# EAGLE board power supply diagram (EAGLE 9.6.2)
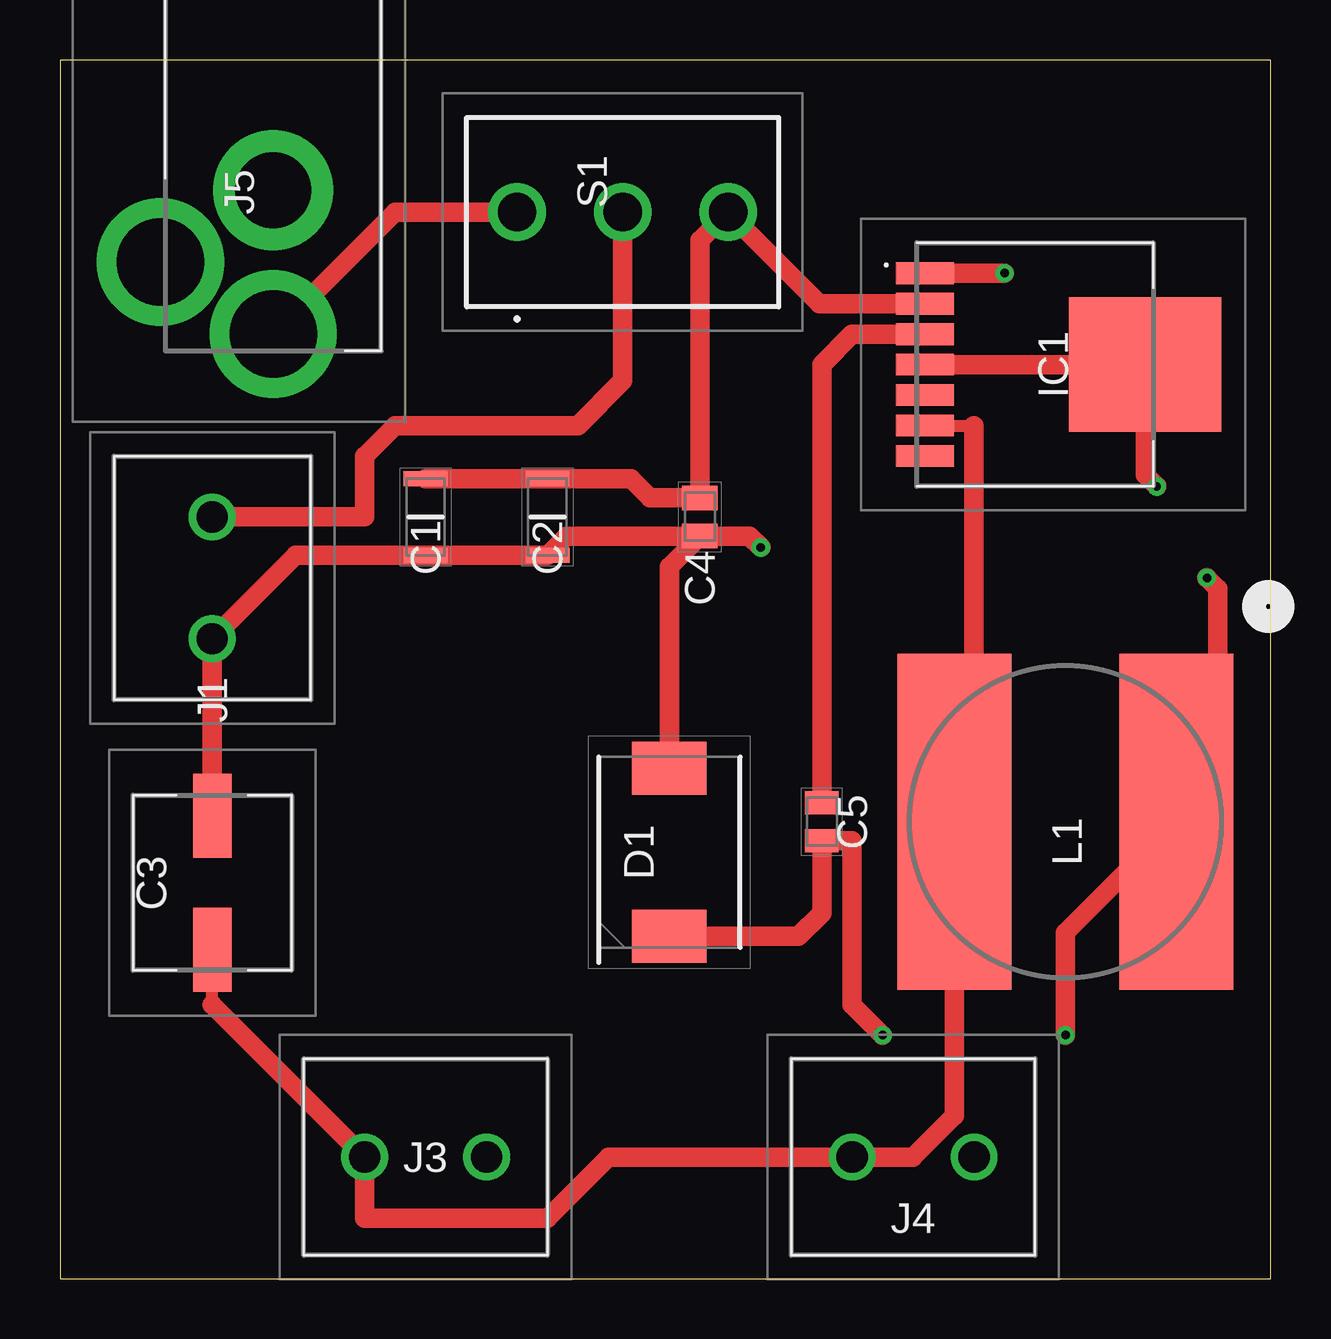
[diagram p0: board, top side]
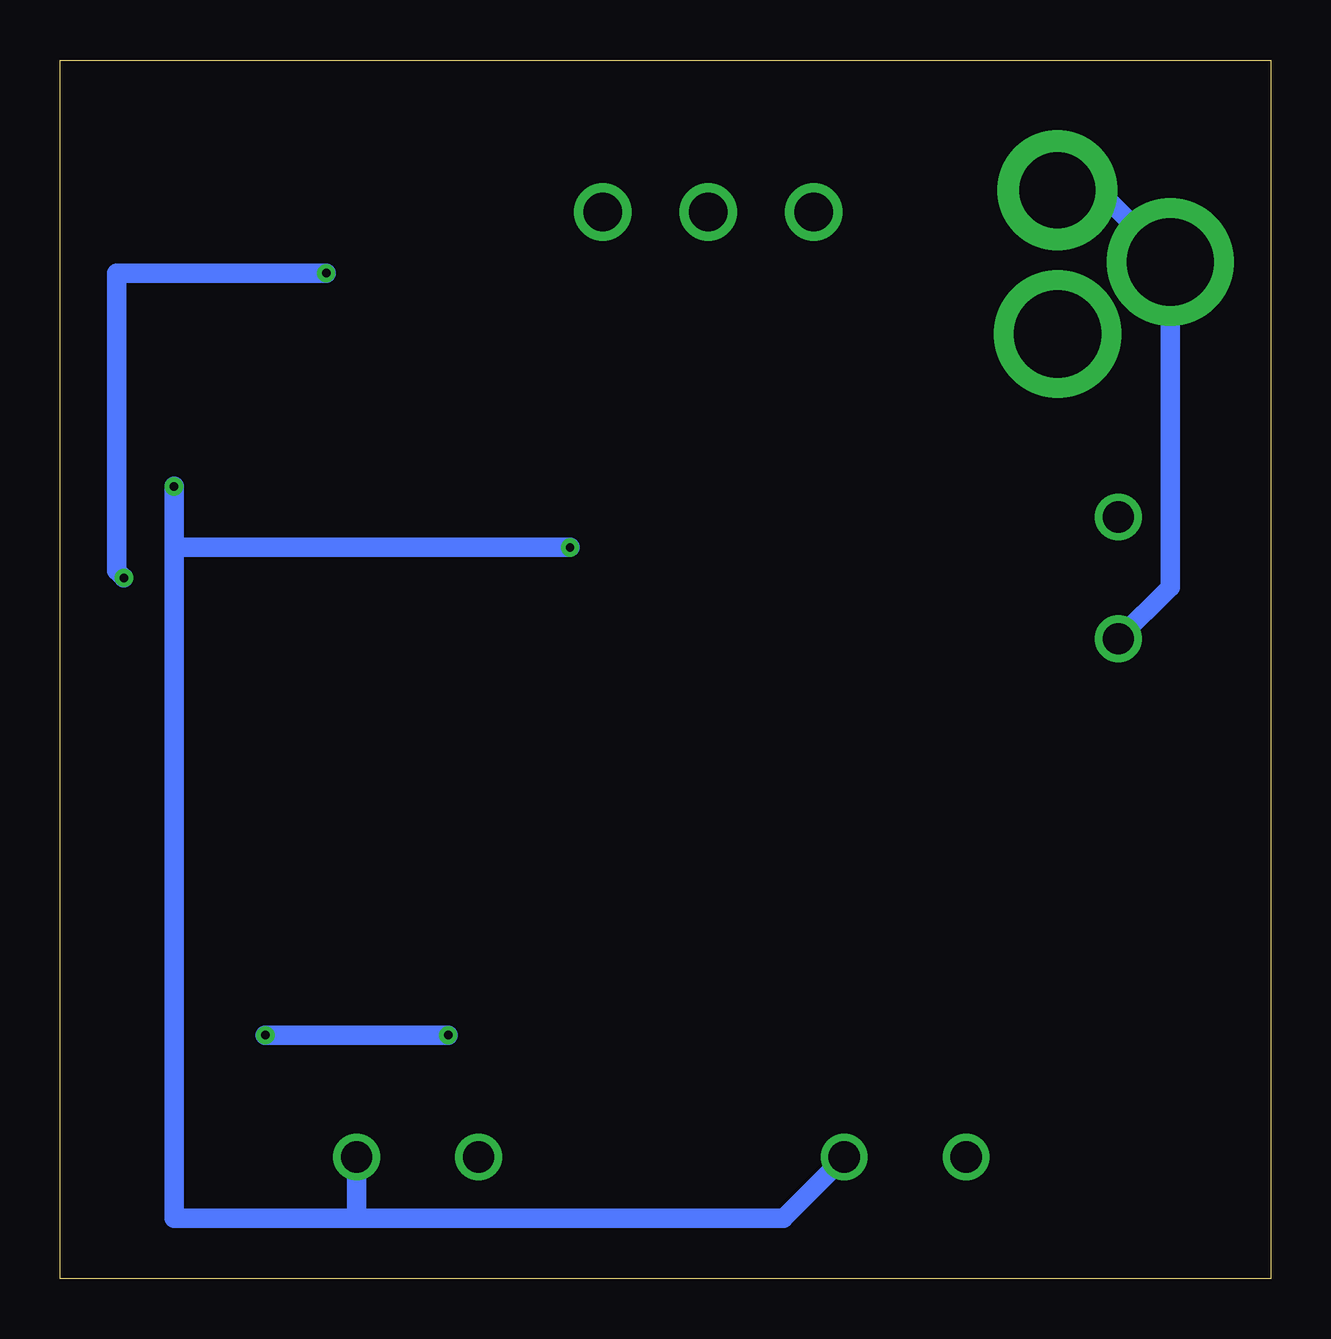
[diagram p1: board, bottom side, seen from below]

Size 50.47 x 50.79 mm. Coordinates in mm from the lower left corner, seen from the top.
Outline: 0,0 50.47,0 50.47,50.79 0,50.79 0,0
Copper layers (1*16): Top 0.035mm / dielectric 1.5mm / Bottom 0.035mm
Design rules "default": minimum track width 6mil, minimum drill 0.35mm, track to track 6mil, track to pad 6mil, pad to pad 6mil, via to via 6mil, smd to smd 6mil, copper to edge 40mil, drill to drill 6mil, minimum pad ring 10mil, minimum via ring 8mil, stop-mask expansion 4mil, vias tented up to drill 0mil, thermal gap 10mil

## Footprints (pad centres in the part's own frame; a part is rotated, then mirrored left to right if it is on the bottom)
CAPC3216X180N = smd 0.62 x 1.82: 1 -1.6,0; 2 1.6,0
16SVPE180M = smd 3.5 x 1.6: 1 -2.8,0; 2 2.8,0
CAPC2012X100N = smd 1.02 x 1.47: 1 -0.8,0; 2 0.8,0
CAPC2012X135N = smd 0.96 x 1.39: 1 -0.79,0; 2 0.79,0
DIOM7959X250N = smd 2.2 x 3.1: 1 -3.5,0; 2 3.5,0
LM22678TJ50NOPB = smd 0.91 x 2.41: 1 -3.81,-4.595; 2 -2.54,-4.595; 3 -1.27,-4.595; 4 0,-4.595; 5 1.27,-4.595; 6 2.54,-4.595; 7 3.81,-4.595 | smd 5.59 x 6.35: 8 0,4.595
TB00650802BE = drill 1.3 pad 1.95: 1 0,0; 2 5.08,0
CONSOCJ2155 = drill 3.64 pad 5.3: 1 0,0; 3 -3,-4.7 | drill 3.162 pad 5: 2 -6,0
SDR1307-220ML = smd 14 x 4.75: 1 0,4.625; 2 0,-4.625
8SS1022Z = drill 1.6 pad 2.4: 1 0,0; 2 0,-4.4; 3 0,-8.8

## Placement (x,y rotation side)
C1  C3216X6S1V106K160AC  [CAPC3216X180N]  15.24,31.75 90 top
C2  C3216X6S1V106K160AC  [CAPC3216X180N]  20.32,31.75 90 top
C3  16SVPE180M  [16SVPE180M]  6.35,16.51 90 top
C4  C0805C105K4RACTU  [CAPC2012X100N]  26.67,31.75 90 top
C5  CC0805KRX7R9BB103  [CAPC2012X135N]  31.75,19.05 270 top
D1  B540C-13-F  [DIOM7959X250N]  25.4,17.78 90 top
IC1  LM22678TJ-5.0_NOPB  [LM22678TJ50NOPB]  40.64,38.1 270 top
J1  TB006-508-02BE  [TB00650802BE]  6.35,26.67 90 top
J3  TB006-508-02BE  [TB00650802BE]  12.7,5.08 0 top
J4  TB006-508-02BE  [TB00650802BE]  33.02,5.08 0 top
J5  CON-SOCJ-2155  [CONSOCJ2155]  8.89,39.37 270 top
L1  SDR1307-4R7ML  [SDR1307-220ML]  41.91,19.05 270 top
S1  8SS1022-Z  [8SS1022Z]  19.05,44.45 90 top

## Library data of the parts
C1 C2 = SamacSys_Parts; DESCRIPTION: Multilayer Ceramic Capacitors MLCC - SMD/SMT 1206 35V 10uF X6S 10% T: 1.6mm; HEIGHT: 1.8mm; MANUFACTURER_NAME: TDK; MANUFACTURER_PART_NUMBER: C3216X6S1V106K160AC; MOUSER_PART_NUMBER: 810-C3216X6S1V106K6A; MOUSER_PRICE-STOCK: https://www.mouser.co.uk/ProductDetail/TDK/C3216X6S1V106K160AC?qs=xLDY6iXSiQbqLIcRZVjJ3A%3D%3D
C3 = SamacSys_Parts; DESCRIPTION: Panasonic Aluminium Polymer Capacitor 180uF 16V dc 6.3mm C10 OS-CON Series, Surface Mount Polymer, +/-20% 6.3 x 9.9mm; HEIGHT: 10mm; MANUFACTURER_NAME: Panasonic; MANUFACTURER_PART_NUMBER: 16SVPE180M; MOUSER_PART_NUMBER: 667-16SVPE180M; MOUSER_PRICE-STOCK: https://www.mouser.co.uk/ProductDetail/Panasonic/16SVPE180M?qs=OE1iw1LrrPH8IiQtRMzKQA%3D%3D
C4 = SamacSys_Parts; DESCRIPTION: 1uF Ceramic Multilayer Capacitor, 16V; HEIGHT: 1mm; MANUFACTURER_NAME: Kemet; MANUFACTURER_PART_NUMBER: C0805C105K4RACTU; MOUSER_PART_NUMBER: 80-C0805C105K4R; MOUSER_PRICE-STOCK: https://www.mouser.co.uk/ProductDetail/KEMET/C0805C105K4RACTU?qs=yrVqjCObULOefkidH6lLLQ%3D%3D
C5 = SamacSys_Parts; DESCRIPTION: 0805 X7R ceramic cap,10nF 50V Phycomp 10nF Multilayer Ceramic Capacitor (MLCC) 50 V dc +/-10% X7R dielectric Standard max op. temp. +125C; HEIGHT: 1.35mm; MANUFACTURER_NAME: YAGEO (PHYCOMP); MANUFACTURER_PART_NUMBER: CC0805KRX7R9BB103; MOUSER_PART_NUMBER: 603-CC805KRX7R9BB103; MOUSER_PRICE-STOCK: https://www.mouser.co.uk/ProductDetail/Yageo/CC0805KRX7R9BB103?qs=AgBp2OyFlx%252BOmOw2rEcWJw%3D%3D
D1 = SamacSys_Parts; DESCRIPTION: Diodes Inc B540C-13-F, SMT Schottky Diode, 40V 5A, 2-Pin DO-214AB; HEIGHT: 2.5mm; MANUFACTURER_NAME: Diodes Inc.; MANUFACTURER_PART_NUMBER: B540C-13-F; MOUSER_PART_NUMBER: 621-B540C-F; MOUSER_PRICE-STOCK: https://www.mouser.co.uk/ProductDetail/Diodes-Incorporated/B540C-13-F?qs=v2dnQLbuoRZXHN%2FK4ft5%252Bg%3D%3D
IC1 = SamacSys_Parts; DESCRIPTION: SIMPLE SWITCHER 4.5V to 42V, 5A Step-Down Voltage Regulator with Precision Enable; HEIGHT: 2.1mm; MANUFACTURER_NAME: Texas Instruments; MANUFACTURER_PART_NUMBER: LM22678TJ-5.0/NOPB; MOUSER_PART_NUMBER: 926-LM22678TJ50NOPB; MOUSER_PRICE-STOCK: https://www.mouser.co.uk/ProductDetail/Texas-Instruments/LM22678TJ-50-NOPB?qs=X1J7HmVL2ZHigSTWjAFUig%3D%3D
J1 J3 J4 = SamacSys_Parts; DESCRIPTION: Fixed Terminal Blocks screw type, 5.08 , horizontal, 2 poles, CUI Blue, slotted screw, PCB mount; HEIGHT: 10.4mm; MANUFACTURER_NAME: CUI Inc.; MANUFACTURER_PART_NUMBER: TB006-508-02BE; MOUSER_PART_NUMBER: 490-TB006-508-02BE; MOUSER_PRICE-STOCK: https://www.mouser.co.uk/ProductDetail/CUI-Devices/TB006-508-02BE?qs=vLWxofP3U2wEdOVV%2FaT04w%3D%3D
J5 = SamacSys_Parts; DESCRIPTION: DC Power Connectors Power Jack/Connector 2.1mm x 5.5mm; HEIGHT: 11mm; MANUFACTURER_NAME: Gravitech; MANUFACTURER_PART_NUMBER: CON-SOCJ-2155; MOUSER_PART_NUMBER: 992-CON-SOCJ-2155; MOUSER_PRICE-STOCK: https://www.mouser.co.uk/ProductDetail/Gravitech/CON-SOCJ-2155/?qs=fkzBJ5HM%252BdCcpvFQyQZHtA%3D%3D
L1 = SamacSys_Parts; DESCRIPTION: Fixed Inductors 4.7uH 20% SMD 1307; HEIGHT: mm; MANUFACTURER_NAME: Bourns; MANUFACTURER_PART_NUMBER: SDR1307-4R7ML; MOUSER_PART_NUMBER: 652-SDR1307-4R7ML; MOUSER_PRICE-STOCK: https://www.mouser.co.uk/ProductDetail/Bourns/SDR1307-4R7ML?qs=uD%2FoUDWqfvTph9Rfuyszgg%3D%3D
S1 = 8SS1022-Z; DESCRIPTION: Slide Switches SPDT, ON-OFF-ON, slide, straight PC terminals, 6A @ 125V AC; HEIGHT: 14.85mm; MANUFACTURER_NAME: NIDEC COPAL; MANUFACTURER_PART_NUMBER: 8SS1022-Z; MOUSER_PART_NUMBER: 229-8SS1022-Z; MOUSER_PRICE-STOCK: https://www.mouser.co.uk/ProductDetail/Nidec-Copal/8SS1022-Z?qs=XeJtXLiO41S0FkmrxT6eNQ%3D%3D

## Nets
GND: C1.1 C2.1 C3.2 C4.1 D1.2 IC1.4 IC1.8 J1.1 J3.2 J4.2 J5.2 J5.3
N$1: C1.2 C2.2 C4.2 IC1.2 S1.3
N$2: J1.2 S1.2
N$3: C5.1 IC1.3
N$4: C5.2 D1.1 IC1.1 L1.1
N$5: C3.1 IC1.6 J3.1 J4.1 L1.2
N$6: J5.1 S1.1

## Tracks (layer width: path | path; a pad name or v marks a point on that pad's centre or on a via)
GND  (via drill 0.35)
  Top 0.813: C4.1 28.74,30.95 v29.21,30.48 | C4.1 21.12,30.95 C2.1 C1.1 9.83,30.15 J1.1 C3.2 | D1.2 25.4,29.68 C4.1 | v45.72,33.02 45.23,33.51 IC1.8 IC1.4
  Bottom 0.813: J3.2 20.32,2.54 38.1,2.54 | 38.1,2.54 J4.2 | v45.72,33.02 45.72,30.48 | 45.72,30.48 45.72,2.54 38.1,2.54 | v29.21,30.48 45.72,30.48 | J1.1 4.19,28.83 J5.3 7.19,45.37 J5.2
N$1
  Top 0.813: IC1.2 31.66,40.64 S1.3 26.67,43.27 C4.2 24.6,32.55 23.8,33.35 C2.2 C1.2
N$2
  Top 0.813: J1.2 12.7,31.75 12.7,34.29 13.97,35.56 21.59,35.56 23.45,37.42 S1.2
N$3
  Top 0.813: C5.1 31.75,38.1 33.02,39.37 IC1.3
N$4  (via drill 0.35)
  Top 0.152: L1.1 48.26,20.77
  Top 0.813: v34.29,10.16 33.02,11.43 33.02,18.26 C5.2 31.75,15.24 30.79,14.28 D1.1 | v41.91,10.16 41.91,14.43 L1.1 | IC1.1 v39.37,41.91 | v47.81,29.21 48.26,28.76 48.26,20.77
  Bottom 0.813: v34.29,10.16 v41.91,10.16 | v39.37,41.91 48.11,41.91 48.11,29.51 v47.81,29.21
N$5
  Top 0.152: 38.1,19.86 L1.2
  Top 0.508: 6.35,11.43 C3.1 | IC1.6 38.1,35.56
  Top 0.813: 6.35,11.43 J3.1 12.7,2.54 20.32,2.54 22.86,5.08 J4.1 35.56,5.08 37.28,6.8 L1.2 | 38.1,35.56 38.1,19.86
N$6
  Top 0.813: J5.1 13.97,44.45 S1.1